# Altium PCB RS485.PcbDoc
Units mm, origin at the board's own origin, x right, y up, seen from the top; angles counter-clockwise.
Board outline 152.4 x 87.25 mm, 2 copper layers (Top Layer, Bottom Layer); 106 components, 76 nets, 344 pads, 58 vias.
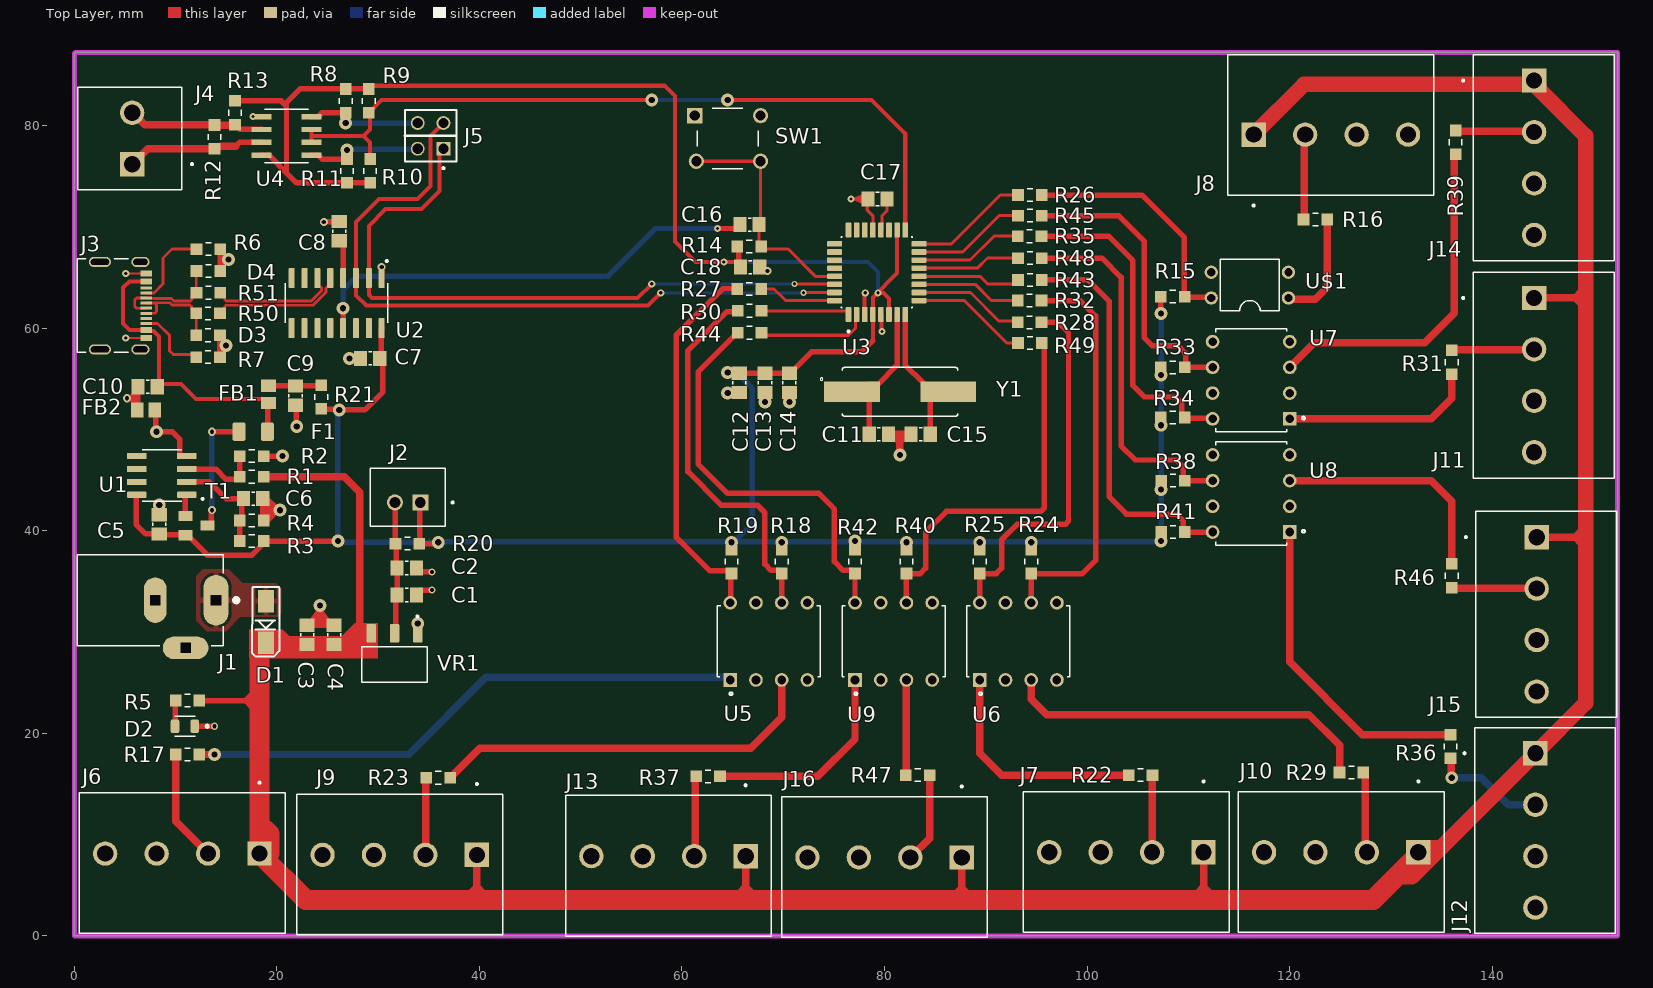
[diagram p0: Top Layer view]
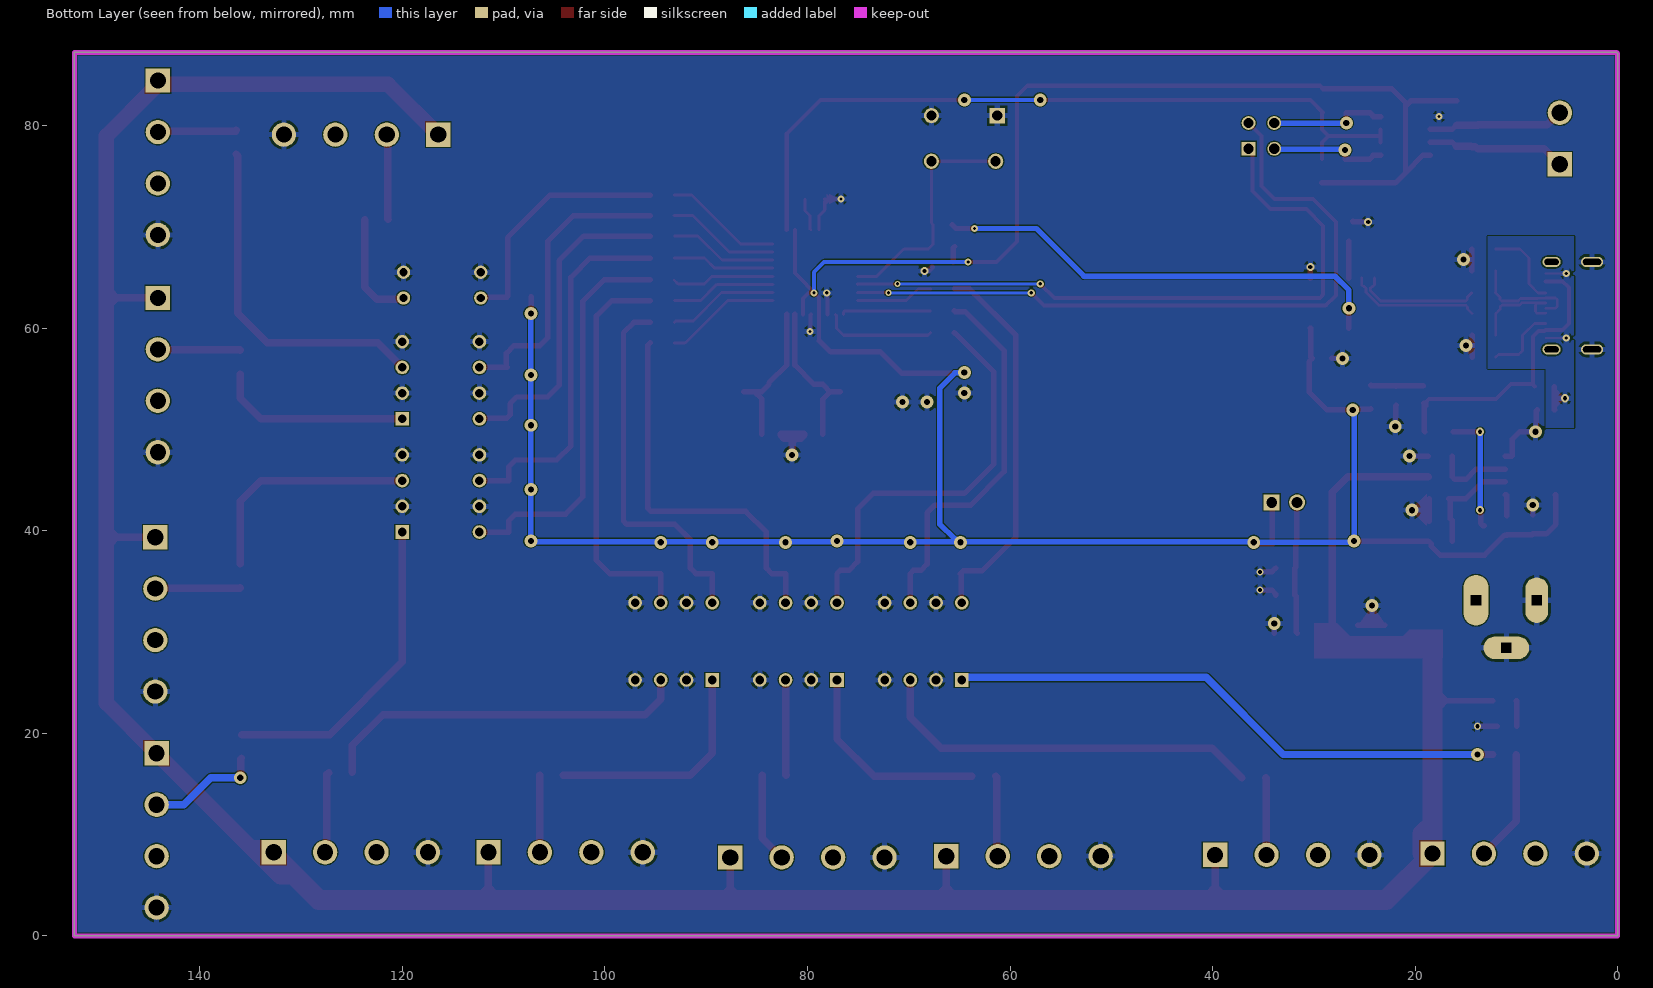
[diagram p1: Bottom Layer view, seen from below]
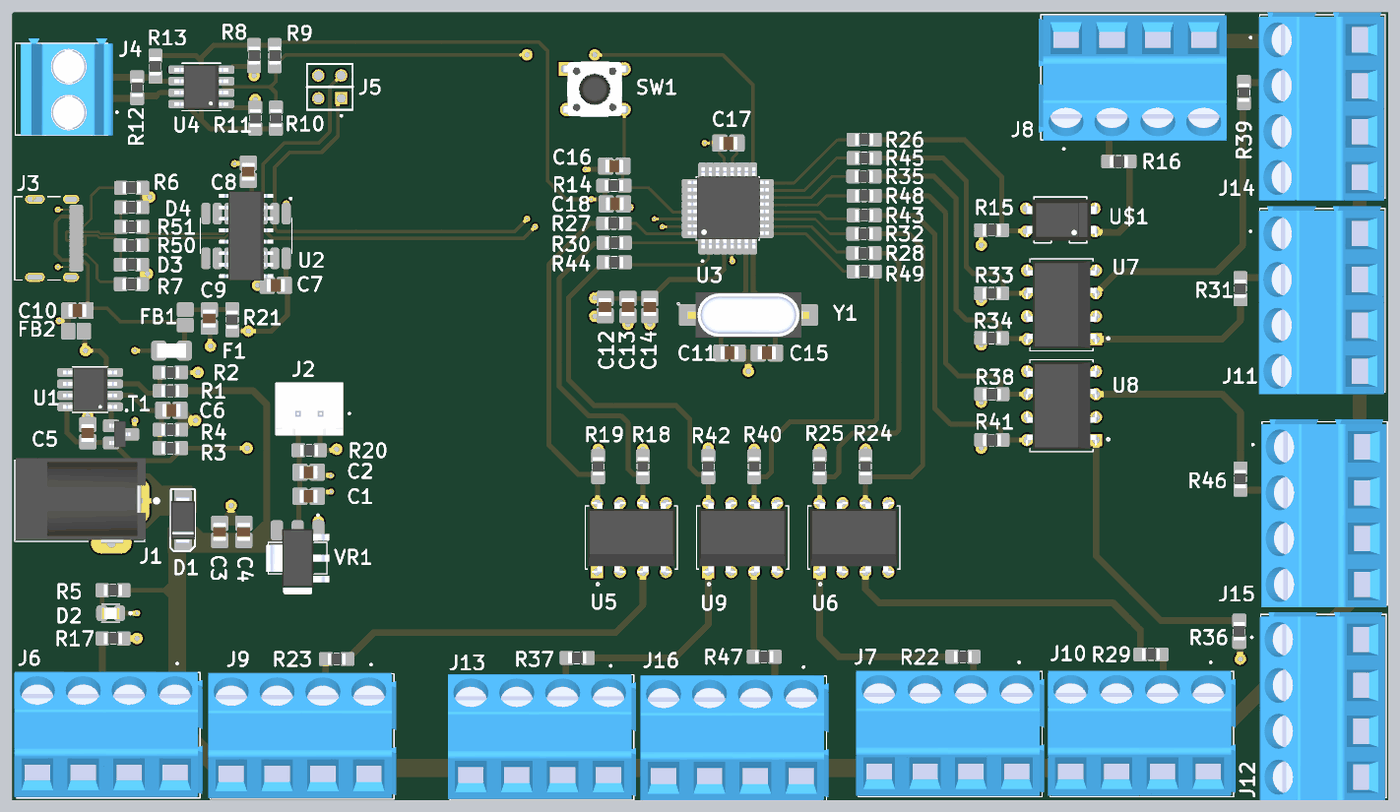
[diagram p2: 3D render of the assembled board from above, using the file's embedded part models]

## Layer stack, top to bottom
Top Solder: solder mask 0.0102, Solder Resist, Dk 3.5
Top Layer: signal copper 0.0356
Dielectric 1: dielectric 0.32, FR-4, Dk 4.8
Bottom Layer: signal copper 0.0356
Bottom Solder: solder mask 0.0102, Solder Resist, Dk 3.5

## Board outline
0,0 152.4,0 152.4,87.249 0.127,87.249 0,87.122

## Design rules (kind name [scope] priority, off if disabled: settings)
Clearance [All] p1: gap=0.1 ignorepadtopadclearanceinfootprint=FALSE
DiffPairsRouting [InDifferentialPairClass('DIFF_90E')] p1: maxlimit=0.127 minlimit=0.127 mostfreqgap=0.127 toplayer_minwidth=0.277 toplayer_maxwidth=0.277 toplayer_prefwidth=0.277 bottomlayer_minwidth=0.277 bottomlayer_maxwidth=0.277 bottomlayer_prefwidth=0.277 impedanceprofiledriven=TRUE impedanceprofileid={61A0B16F-B477-4809-B491-3CA5D92DA443} impedanceprofilevalue=90.000000 maxuncoupledlength=12.7
HoleSize [All] p1: absolutevalues=TRUE maxlimit=3.54 minlimit=0.025 maxpercent=80.000 minpercent=20.000
MinimumSolderMaskSliver [All] p1: minsoldermaskwidth=0.01
PasteMaskExpansion [All] p1: expansion=0.2
PlaneConnect [All] p1: planeconnectstyle=Relief reliefexpansion=0.508 reliefentries=4 reliefconductorwidth=0.454 reliefairgap=0.254
PolygonConnect [All] p1: connectstyle=Relief reliefconductorwidth=0.554 reliefentries=4 polygonreliefangle="90 Angle" airgapwidth=0.254
RoutingVias [All] p1: holewidth=0.411 width=0.7 viastyle="Through Hole" minholewidth=0.311 minwidth=0.5 maxholewidth=2 maxwidth=2.5
SilkToSilkClearance [All] p1: silktosilkclearance=0.01
SilkToSolderMaskClearance [IsPad] p1: minsilkscreentomaskgap=0.01 clearancetoexposedcopper=TRUE
SolderMaskExpansion [All] p1: expansion=0.202 istentingtop=FALSE
SupplyNets "Schematic Supply Nets_1" [InNet('GND')] p1: voltage=0.000
SupplyNets "Schematic Supply Nets_5" [InNet('+12')] p2: voltage=0.000
SupplyNets "Schematic Supply Nets_3" [InNet('VUSB')] p3: voltage=0.000
SupplyNets "Schematic Supply Nets_2" [InNet('+5')] p4: voltage=0.000
SupplyNets "Schematic Supply Nets" [InNet('+5DC')] p5: voltage=0.000
Width [All] p1: maxlimit=2 minlimit=0.2 preferedwidth=0.54
23 further rules are at their usual default settings.

## Classes and differential pairs
differential pair class DIFF_90E: USBD V_USBD
component class RS485_2: C11 C12 C13 C14 C15 C16 C17 C18 J4 J5 J6 J7 J8 J9 J10 J11 J12 J13 J14 J15 J16 R8 R9 R10 R11 R12 R13 R14 R15 R16 R17 R18 R19 R22 R23 R24 R25 R26 R27 R28 R29 R30 R31 R32 R33 R34 R35 R36 R37 R38 R39 R40 R41 R42 R43 R44 R45 R46 R47 R48 R49 SW1 U3 U4 U5 U6 U7 U8 U9 U$1 Y1
component class RS485_1: C1 C2 C3 C4 C5 C6 C7 C8 C9 C10 D1 D2 D3 D4 F1 FB1 FB2 J1 J2 J3 R1 R2 R3 R4 R5 R6 R7 R20 R21 R50 R51 T1 U1 U2 VR1
differential pair USBD: +USBD_P -USBD_N
differential pair V_USBD: +V_USBD_P -V_USBD_N

## Components (designator, comment, footprint, x,y, rotation, side; value= is the part's Value field where it differs from the comment)
C1 "CAP CER 10uF 5%" "CAP CER 100pF 5%" 32.827,33.655 r0 top
C2 "CAP CER 100nF 5%" "CAP CER 100pF 5%" 32.827,36.322 r0 top
C3 "CAP CER 10uF 5%" "CAP CER 100pF 5%" 22.987,29.718 r90 top
C4 "CAP CER 100nF 5%" "CAP CER 100pF 5%" 25.654,29.718 r90 top
C5 "CAP CER 100nF 5%" "CAP CER 100pF 5%" 8.382,40.64 r90 top
C6 "CAP CER 100nF 5%" "CAP CER 100pF 5%" 17.653,43.18 r0 top
C7 "CAP CER 100nF 5%" "CAP CER 100pF 5%" 29.21,57.023 r180 top
C8 "CAP CER 10nF 5%" "CAP CER 100pF 5%" 26.162,69.596 r90 top
C9 "CAP CER 100nF 5%" "CAP CER 100pF 5%" 21.844,53.34 r270 top
C10 "CAP CER 100nF 5%" "CAP CER 100pF 5%" 7.239,54.229 r180 top
C11 "CAP CER 22pF 5%" "CAP CER 100pF 5%" 79.441,49.53 r180 top
C12 "CAP CER 100nF 5%" "CAP CER 100pF 5%" 65.659,54.61 r270 top
C13 "CAP CER 100nF 5%" "CAP CER 100pF 5%" 68.199,54.61 r270 top
C14 "CAP CER 100nF 5%" "CAP CER 100pF 5%" 70.612,54.61 r270 top
C15 "CAP CER 22pF 5%" "CAP CER 100pF 5%" 83.566,49.53 r0 top
C16 "CAP CER 100nF 5%" "CAP CER 100pF 5%" 66.675,70.231 r0 top
C17 "CAP CER 100nF 5%" "CAP CER 100pF 5%" 79.309,72.771 r180 top
C18 "CAP CER 100nF 5%" "CAP CER 100pF 5%" 66.741,66.04 r0 top
D1 "Diode DO-214AC" "Diode DO-214AC" 18.923,31.006 r90 top
D2 "LED-0805" LED-0805 10.922,20.701 r180 top
D3 "0805" "TVS Diode,Uni-Directional, 4-Pin" 13.208,59.309 r180 top
D4 "0805" "TVS Diode,Uni-Directional, 4-Pin" 13.24,65.659 r180 top
F1 "1206" FUSE 17.661,49.784 r0 top
FB1 "Ferrite Bead" "Ferrite Bead" 19.177,53.467 r270 top
FB2 "Ferrite Bead" "Ferrite Bead" 7.083,51.943 r180 top
J1 "Dc Power Jack Connector" "Dc Power Jack Connector" 7.493,33.147 r180 top
J2 "2.54mm" JST_2PIN 32.913,43.324 r0 top
J3 "USB Type C" "USB Type C MOLEX" 3.683,62.23 r270 top
J4 "Connector 5.08 mm" "Connector 5.08 mm" 5.715,76.2 r90 top
J5 "4X2 PIN" "4PIN BURGE" 36.449,77.724 r90 top
J6 "4PIN 5.08MM" "TERMINSL SCREW" 18.288,8.128 r180 top
J7 "4PIN 5.08MM" "TERMINSL SCREW" 111.506,8.255 r180 top
J8 "4PIN 5.08MM" "TERMINSL SCREW" 116.459,79.121 r0 top
J9 "4PIN 5.08MM" "TERMINSL SCREW" 39.751,8.001 r180 top
J10 "4PIN 5.08MM" "TERMINSL SCREW" 132.715,8.255 r180 top
J11 "4PIN 5.08MM" "TERMINSL SCREW" 144.145,62.992 r270 top
J12 "4PIN 5.08MM" "TERMINSL SCREW" 144.272,18.034 r270 top
J13 "4PIN 5.08MM" "TERMINSL SCREW" 66.294,7.874 r180 top
J14 "4PIN 5.08MM" "TERMINSL SCREW" 144.145,84.455 r270 top
J15 "4PIN 5.08MM" "TERMINSL SCREW" 144.399,39.37 r270 top
J16 "4PIN 5.08MM" "TERMINSL SCREW" 87.63,7.747 r180 top
R1 "RES 0805 10K 5%" "RES 0805 10K 5%" 17.526,45.339 r0 top
R2 "RES 0805 10K 5%" "RES 0805 10K 5%" 17.526,47.371 r180 top
R3 "RES 0805 4.3K 5%" "RES 0805 10K 5%" 17.526,38.989 r180 top
R4 "RES 0805 10K 5%" "RES 0805 10K 5%" 17.526,41.021 r180 top
R5 "RES 0805 1K 5%" "RES 0805 10K 5%" 11.176,23.241 r180 top
R6 "RES 0805 5.1K 5%" "RES 0805 10K 5%" 13.24,67.818 r180 top
R7 "RES 0805 5.1K 5%" "RES 0805 10K 5%" 13.208,57.15 r0 top
R8 "RES 0805 10K 5%" "RES 0805 10K 5%" 26.797,82.455 r90 top
R9 "RES 0805 10K 5%" "RES 0805 10K 5%" 29.083,82.455 r90 top
R10 "RES 0805 10K 5%" "RES 0805 10K 5%" 29.21,75.533 r270 top
R11 "RES 0805 10K 5%" "RES 0805 10K 5%" 26.924,75.533 r270 top
R12 "RES 0805 120E 5%" "RES 0805 10K 5%" 13.843,78.899 r90 top
R13 "RES 0805 20K 5%" "RES 0805 10K 5%" 15.875,81.28 r270 top
R14 "RES 0805 10K 5%" "RES 0805 10K 5%" 66.643,68.072 r0 top
R15 "RES 0805 10K 5%" "RES 0805 10K 5%" 108.458,63.119 r180 top
R16 "RES 0805 1K 5%" "RES 0805 10K 5%" 122.555,70.739 r0 top
R17 "RES 0805 1K 5%" "RES 0805 10K 5%" 11.176,17.907 r0 top
R18 "RES 0805 10K 5%" "RES 0805 10K 5%" 69.85,36.957 r90 top
R19 "RES 0805 10K 5%" "RES 0805 10K 5%" 64.897,36.957 r90 top
R20 "RES 0805 0E 5%" "RES 0805 10K 5%" 32.893,38.735 r0 top
R21 "RES 0805 0E 5%" "RES 0805 10K 5%" 24.384,53.213 r90 top
R22 "RES 0805 1K 5%" "RES 0805 10K 5%" 105.283,15.875 r180 top
R23 "RES 0805 1K 5%" "RES 0805 10K 5%" 35.941,15.621 r0 top
R24 "RES 0805 10K 5%" "RES 0805 10K 5%" 94.488,36.957 r90 top
R25 "RES 0805 10K 5%" "RES 0805 10K 5%" 89.408,36.957 r90 top
R26 "RES 0805 0E 5%" "RES 0805 10K 5%" 94.361,73.152 r0 top
R27 "RES 0805 0E 5%" "RES 0805 10K 5%" 66.643,63.881 r180 top
R28 "RES 0805 0E 5%" "RES 0805 10K 5%" 94.329,60.579 r0 top
R29 "RES 0805 1K 5%" "RES 0805 10K 5%" 126.111,16.129 r180 top
R30 "RES 0805 0E 5%" "RES 0805 10K 5%" 66.675,61.722 r180 top
R31 "RES 0805 1K 5%" "RES 0805 10K 5%" 136.017,56.642 r270 top
R32 "RES 0805 0E 5%" "RES 0805 10K 5%" 94.329,62.738 r0 top
R33 "RES 0805 10K 5%" "RES 0805 10K 5%" 108.458,56.134 r180 top
R34 "RES 0805 10K 5%" "RES 0805 10K 5%" 108.458,51.181 r180 top
R35 "RES 0805 0E 5%" "RES 0805 10K 5%" 94.329,69.088 r0 top
R36 "RES 0805 1K 5%" "RES 0805 10K 5%" 135.89,18.701 r90 top
R37 "RES 0805 1K 5%" "RES 0805 10K 5%" 62.579,15.748 r0 top
R38 "RES 0805 10K 5%" "RES 0805 10K 5%" 108.49,44.958 r180 top
R39 "RES 0805 1K 5%" "RES 0805 10K 5%" 136.398,78.359 r270 top
R40 "RES 0805 10K 5%" "RES 0805 10K 5%" 82.169,36.957 r90 top
R41 "RES 0805 10K 5%" "RES 0805 10K 5%" 108.49,39.878 r180 top
R42 "RES 0805 10K 5%" "RES 0805 10K 5%" 77.089,36.957 r90 top
R43 "RES 0805 0E 5%" "RES 0805 10K 5%" 94.361,64.77 r0 top
R44 "RES 0805 0E 5%" "RES 0805 10K 5%" 66.675,59.563 r180 top
R45 "RES 0805 0E 5%" "RES 0805 10K 5%" 94.361,71.12 r0 top
R46 "RES 0805 1K 5%" "RES 0805 10K 5%" 136.017,35.56 r90 top
R47 "RES 0805 1K 5%" "RES 0805 10K 5%" 83.28,15.875 r180 top
R48 "RES 0805 0E 5%" "RES 0805 10K 5%" 94.361,66.929 r0 top
R49 "RES 0805 0E 5%" "RES 0805 10K 5%" 94.361,58.547 r0 top
R50 "RES 0805 22E 5%" "RES 0805 10K 5%" 13.208,61.468 r0 top
R51 "RES 0805 22E 5%" "RES 0805 10K 5%" 13.24,63.5 r0 top
SW1 "PUSH BUTTON" "Push Button" 64.516,78.74 r0 top
T1 "P-MOS SI2301" PMOS_SOT23 12.065,40.513 r270 top
U1 "SOIC-8" OPAMP 8.636,45.466 r180 top
U2 "HC340C" HC340C 25.908,62.484 r270 top
U3 "ATMEGA328P-AU" ATMEGA328P-AU 79.248,65.532 r90 top
U4 "MAX485CSA-RS-485/RS-422 Transceivers" "MAX485CSA-RS-485/RS-422 Transceivers" 20.955,78.994 r180 top
U5 "OPTOCOUPLER" OPTOCOUPLER 68.58,29.083 r90 top
U6 "OPTOCOUPLER" OPTOCOUPLER 93.218,29.083 r90 top
U7 "OPTOCOUPLER" OPTOCOUPLER 116.205,54.864 r180 top
U8 "OPTOCOUPLER" OPTOCOUPLER 116.205,43.688 r180 top
U9 "OPTOCOUPLER" OPTOCOUPLER 80.899,29.083 r90 top
U$1 "Optoc_4pin" Optoisolator 116.078,64.262 r90 top
VR1 "LM1117IMPX-5.0" LM1117IMPX-5.0 31.623,26.797 r270 top
Y1 "Crystal 16 Mhz SMD" "Crystal 16 Mhz SMD" 81.534,53.721 r0 top

## Footprints (in the part's own frame and the unit in brackets; to place one, negate y for a bottom-side part, rotate by r counter-clockwise, add the part's x,y. Pads: shape width x height; smd on the part's side, far side on the other; paste and mask are expansions set on the pad)
"4PIN BURGE" [mm] "Connector Header Through Hole 4 position 0.100 (2.54mm), 4X2 PIN"
  rect 1.37x1.37 hole 1.02: 01(0,0)
  round 1.37 hole 1.02: 02(0,2.54) 03(2.54,0) 04(2.54,2.54)
  silkscreen extent -2.02,-1.27 3.81,3.81
ATMEGA328P-AU [mm] "ATMEGA328P-AU MCU 8-bit 20 MHz - 32 KB - 2 KB - TQFN32"
  rrect25% 1.47x0.55 smd: 1(-4.17,2.8) 2(-4.17,2) 3(-4.17,1.2) 4(-4.17,0.4) 5(-4.17,-0.4) 6(-4.17,-1.2) 7(-4.17,-2) 8(-4.17,-2.8) 17(4.17,-2.8) 18(4.17,-2) 19(4.17,-1.2) 20(4.17,-0.4) 21(4.17,0.4) 22(4.17,1.2) 23(4.17,2) 24(4.17,2.8)
  rrect25% 0.55x1.47 smd: 9(-2.8,-4.17) 10(-2,-4.17) 11(-1.2,-4.17) 12(-0.4,-4.17) 13(0.4,-4.17) 14(1.2,-4.17) 15(2,-4.17) 16(2.8,-4.17) 25(2.8,4.17) 26(2,4.17) 27(1.2,4.17) 28(0.4,4.17) 29(-0.4,4.17) 30(-1.2,4.17) 31(-2,4.17) 32(-2.8,4.17)
  silkscreen extent -5.94,-3.5 3.5,3.5, body extent -4.43,-4.57 4.57,4.43, height 1.2
"CAP CER 100pF 5%" [mm] "CAP CER 100PF50V X7R 0805"
  rect 1.3x1.5 smd: 1(-0.95,0) 2(0.95,0)
  silkscreen extent -0.15,-0.65 0.15,0.65, body extent -1,-0.72 1,0.72, height 1.22
"Connector 5.08 mm" [mm] "MOLEX,Screw Type, Horizontal, 5.08 Pitch, 24~12 (AWG), Terminal Block Connector"
  rect 2.4x2.4 / inner round 2.4 / far side rect 2.4x2.4 hole 1.6: 1(0,0)
  round 2.4 hole 1.6: 2(5.08,0)
  silkscreen extent -2.54,-6 7.62,5.35, body extent -2.59,-5.46 8.17,4.79, height 14
"Crystal 16 Mhz SMD" [mm] "16 Mhz Crystal SMD –CSM-4ALX(28ALX) 12.5mmX4.85mmX4mm"
  rect 5.5x2 smd: 1(-4.75,0) 2(4.75,0)
  silkscreen extent -7.88,-2.41 5.71,2.41, body extent -6.75,-2.5 6.75,2.5, height 4.5
"Dc Power Jack Connector" [mm] "CUI_PJ-202AH"
  oval 2.5x5 hole 1 square: 1(-6.5,0)
  oval 2.25x4.5 hole 1 square: 2(-0.5,0)
  oval 4.5x2.25 hole 1 square: 3(-3.5,4.7)
  silkscreen extent -8.7,-4.5 7.2,4.5, body extent -7.29,-4.7 7.11,4.7, height 11
"Diode DO-214AC" [mm] "Diode Standard 100 V 1A Surface Mount DO-214AC (SMA)"
  rect 2.2x1.55 smd: 1(-2.05,0) 2(2.05,0)
  silkscreen extent -3.43,-1.33 3.43,1.4, body extent -2.55,-1.33 2.55,1.33, height 2.29
"Ferrite Bead" [mm] "Ferrite Bead 0805"
  rect 1.2x1.47 smd: 1(-0.86,0) 2(0.86,0)
FUSE [mm] "C1H25 .5 A 125 V AC 32 V DC Fuse Board Mount (Cartridge Style Excluded) Surface Mount 1206 (3216 Metric)"
  rrect30% 1.3x1.8 smd: 1(-1.405,0) 2(1.405,0)
  body extent -1.6,-0.79 1.6,0.79, height 0.85
HC340C [mm] "FTDI 16-SOIC"
  rrect25% 1.97x0.6 smd: 1(-2.475,4.445) 2(-2.475,3.175) 3(-2.475,1.905) 4(-2.475,0.635) 5(-2.475,-0.635) 6(-2.475,-1.905) 7(-2.475,-3.175) 8(-2.475,-4.445) 9(2.475,-4.445) 10(2.475,-3.175) 11(2.475,-1.905) 12(2.475,-0.635) 13(2.475,0.635) 14(2.475,1.905) 15(2.475,3.175) 16(2.475,4.445)
  silkscreen extent -4.24,-5.06 1.95,5.06, body extent -3,-4.95 3,4.95, height 1.75
JST_2PIN [mm] "B2B-XH-A(LF)(SN),Connector Header Through Hole 3 position 0.098 (2.50mm)Connector Header Through Hole 2 position 0.098 (2.50mm)"
  rect 1.575x1.575 / inner round 1.575 / far side rect 1.575x1.575 hole 1.05: 1(1.25,-0.525)
  round 1.575 hole 1.05: 2(-1.25,-0.525)
  silkscreen extent -3.7,-2.88 4.54,2.88, body extent -3.7,-2.88 3.7,2.88, height 7
LED-0805 [mm] "Red 640nm LED Indication - Discrete 1.85V 0805 (2012 Metric)"
  rrect50% 0.86x1.36 smd: A(0.975,0) C(-0.975,0)
  silkscreen extent -2.3,-0.99 1,0.99, body extent -1,-0.63 1,0.63, height 0.75
LM1117IMPX-5.0 [mm]
  rrect25% 1.84x0.93 smd: 1(-3.085,2.3) 2(-3.085,0) 3(-3.085,-2.3)
  rrect25% 1.84x3.19 on Top Overlay: 4(3.085,0)
  silkscreen extent -4.85,-3.25 1.75,3.25, body extent -3.5,-3.25 3.5,3.25, height 1.8
"MAX485CSA-RS-485/RS-422 Transceivers" [mil] "Low-Power, Slew-Rate-Limited RS-485/RS-422 Transceivers, SOIC-8"
  rect 78x21 smd: 1(-97,75) 2(-97,25) 3(-97,-25) 4(-97,-75) 5(97,-75) 6(97,-25) 7(97,25) 8(97,75)
  silkscreen extent -84,-104 84,104, body extent -118,-96 118,96, height 69
OPAMP [mm] "LMV342MA,Dual, 5.5-V, 1-MHz, high output current (75-mA) op amp,SOIC-8"
  rrect25% 1.97x0.6 smd: 1(-2.47,1.905) 2(-2.47,0.635) 3(-2.47,-0.635) 4(-2.47,-1.905) 5(2.47,-1.905) 6(2.47,-0.635) 7(2.47,0.635) 8(2.47,1.905)
  silkscreen extent -4.14,-2.52 1.95,2.52, body extent -3,-2.45 3,2.45, height 1.75
OPTOCOUPLER [mm] "TLP521-2,Optoisolateur Ã  sortie transistor 5300 Vrms 2 canaux 8 DIP"
  rect 1.35x1.35 / inner round 1.35 / far side rect 1.35x1.35 hole 0.85: 1(-3.81,3.81)
  round 1.35 hole 0.85: 2(-3.81,1.27) 3(-3.81,-1.27) 4(-3.81,-3.81) 5(3.81,-3.81) 6(3.81,-1.27) 7(3.81,1.27) 8(3.81,3.81)
  silkscreen extent -5.31,-5.09 3.5,5.09, body extent -3.94,-4.83 3.94,4.83, height 4.85
Optoisolator [mil] "TLP521-1,Optoisolator Transistor Output 5300Vrms 1 Channel 4-DIP"
  round 52 hole 32: 1(-50,-150) 2(50,-150) 3(50,150) 4(-50,150)
  silkscreen extent -100,-115 100,115, body extent -91,-160 91,150, height 197
PMOS_SOT23 [mm] "MOSFET P-CH 20V 2.2A SOT23-3"
  rect 1x1.4 smd: 1(-0.95,-1.1) 2(0.95,-1.1) 3(0,1.1)
  body extent -1.46,-1.31 1.46,1.06, height 1.25
"Push Button" [mm] "Switch Push Button OFF (ON) SPST Round Button 0.05A 24VDC Momentary Contact PC Pins Thru-Hole"
  rect 1.498x1.498 / inner round 1.498 / far side rect 1.498x1.498 hole 0.99: 1(-3.25,2.25)
  round 1.498 hole 0.99: 2(3.25,2.25) 3(-3.1,-2.25) 4(3.25,-2.25)
  silkscreen extent -3,-3 3,3, body extent -3.9,-3 3.9,3, height 17.01
"RES 0805 10K 5%" [mm] "RESISTOR, THICK FILM, 10K, 5%, 0805, FRESISTOR, THICK FILM, 10K, 5%, 0805, FULL REEL Product Range:PANASONIC - ERJ Series"
  rect 1.15x1.15 smd: 1(-1.175,0) 2(1.175,0)
  silkscreen extent -0.28,-0.63 0.28,0.63, body extent -1,-0.63 1,0.63, height 0.7
"TERMINSL SCREW" [mm] "TERMINSL SCREW, 4PIN, 5.08MM"
  rect 2.4x2.4 / inner round 2.4 / far side rect 2.4x2.4 hole 1.6: 1(0,0)
  round 2.4 hole 1.6: 2(5.08,0) 3(10.16,0) 4(15.24,0)
  silkscreen extent -2.54,-7.1 17.78,7.89, body extent -2.79,-6.1 18.03,7.79, height 15.82
"TVS Diode,Uni-Directional, 4-Pin" [mm] "TVS Diode,Uni-Directional,5V, 0805"
  rect 1.15x1.15 smd: 1(-1.175,0) 2(1.175,0)
  silkscreen extent -0.28,-0.63 0.28,0.63, body extent -1,-0.63 1,0.63, height 0.7
"USB Type C MOLEX" [mm] "USB Type C MOLEX_2171790001"
  rect 0.59x1.15 smd mask+0.064: A1B12(-3.2,3.425) A4B9(-2.4,3.425) B1A12(3.2,3.425) B4A9(2.4,3.425)
  rect 0.298x1.15 smd mask+0.064: A5(-1.25,3.425) A6(-0.25,3.425) A7(0.25,3.425) A8(1.25,3.425) B5(1.75,3.425) B6(0.75,3.425) B7(-0.75,3.425) B8(-1.75,3.425)
  oval 1x2.2 hole 0.6 slot 1.8 at 90 deg mask+0.064: SH1(-4.32,-1.15) SH2(4.32,-1.15)
  oval 1x1.8 hole 0.6 slot 1.4 at 90 deg mask+0.064: SH3(-4.32,2.85) SH4(4.32,2.85)
  silkscreen extent -4.62,-3.4 4.62,1.63

## Part data
C1 C2 C3 C4 C5 C6 C7 C8 C9 C10 C11 C12 C13 C14 C15 C16 C17 C18: library part "CAP CER 100pF 5%", "CAP CER 100PF50V X7R 0805", Package=None, Availability=Unavailable, MP=GCJ216R71H222KA01D, Price=None
D1: "Diode Standard 100 V 1A Surface Mount DO-214AC (SMA)", Package="DO-214 Vishay Semiconductor", Check_prices=https://www.snapeda.com/parts/S1B-E3/61T/Vishay/view-part/?ref=eda, MF="Vishay Semiconductor", MP=S1B-E3/61T, SnapEDA_Link=https://www.snapeda.com/parts/S1B-E3/61T/Vishay/view-part/?ref=snap
D2: "Red 640nm LED Indication - Discrete 1.85V 0805 (2012 Metric)", Package="0805 Kingbright", Check_prices=https://www.snapeda.com/parts/APT2012SRCPRV/Kingbright/view-part/?ref=eda, MF=Kingbright, MP=APT2012SRCPRV, SnapEDA_Link=https://www.snapeda.com/parts/APT2012SRCPRV/Kingbright/view-part/?ref=snap
D3 D4: library part "TVS Diode", "Nexperia PRTR5V0U2X,215, Dual-Element Uni-Directional TVS Diode, 0805, 5V", Package="TO-253-4 Nexperia USA Inc.", Availability="In Stock", Check_prices=https://www.snapeda.com/parts/PRTR5V0U2X/NXP+Semiconductors/view-part/?ref=eda, MF="NXP Semiconductors", MP=PRTR5V0U2X, Price=None, Purchase-URL=https://pricing.snapeda.com/search/part/PRTR5V0U2X/?ref=eda, SnapEDA_Link=https://www.snapeda.com/parts/PRTR5V0U2X/NXP+Semiconductors/view-part/?ref=snap
F1: library part FUSE, "C1H25 .5 A 125 V AC 32 V DC Fuse Board Mount (Cartridge Style Excluded) Surface Mount 1206 (3216 Metric)", Package="1206 Bel Fuse Inc.", Check_prices=https://www.snapeda.com/parts/C1H25/Bel+Circuit+Protection/view-part/?ref=eda, MF="Bel Fuse", MP=C1H25, SnapEDA_Link=https://www.snapeda.com/parts/C1H25/Bel+Circuit+Protection/view-part/?ref=snap
FB1 FB2: "Ferrite Bead 0805", Package=None, Availability=Unavailable, MP=MPZ2012S102AT000, Price=None
J1: "PJ-202AH, 2.0 x 6.5 mm, 5.0 A, Horizontal, Through Hole, Kinked Pins, Dc Power Jack Connector", Package=None, Check_prices=https://www.snapeda.com/parts/PJ-202AH/Same+Sky/view-part/?ref=eda, MF="Same Sky", MP=PJ-202AH, SnapEDA_Link=https://www.snapeda.com/parts/PJ-202AH/Same+Sky/view-part/?ref=snap
J2: library part JST_2PIN, "B2B-XH-A(LF)(SN),Connector Header Through Hole 3 position 0.098 (2.50mm)Connector Header Through Hole 2 position 0.098 (2.50mm)", Package=None, Check_prices=https://www.snapeda.com/parts/B2B-XH-A(LF)(SN)/JST/view-part/?ref=eda, MF="JST Sales", MP=B2B-XH-A(LF)(SN), SnapEDA_Link=https://www.snapeda.com/parts/B2B-XH-A(LF)(SN)/JST/view-part/?ref=snap
J3: "USB Type C - Connector, Top-mount SMT, 16pos", Package=None, Check_prices=https://www.snapeda.com/parts/217179-0001/Molex/view-part/?ref=eda, MF=Molex, MP=217179-0001, SnapEDA_Link=https://www.snapeda.com/parts/217179-0001/Molex/view-part/?ref=snap
J4: "MOLEX,Screw Type, Horizontal, 5.08 Pitch, 24~12 (AWG), Terminal Block Connector", Package=None, Check_prices=https://www.snapeda.com/parts/TB007-508-02BE/Same+Sky/view-part/?ref=eda, MF="Same Sky", MP=TB007-508-02BE, SnapEDA_Link=https://www.snapeda.com/parts/TB007-508-02BE/Same+Sky/view-part/?ref=snap
J5: library part "4PIN BURGE", "Connector Header Through Hole 4 position 0.100 (2.54mm), 4X2 PIN", Package=None, Check_prices=https://www.snapeda.com/parts/MTLW-102-05-G-D-180/Samtec/view-part/?ref=eda, MF=Samtec, MP=MTLW-102-05-G-D-180, SnapEDA_Link=https://www.snapeda.com/parts/MTLW-102-05-G-D-180/Samtec/view-part/?ref=snap
J6 J7 J8 J9 J10 J11 J12 J13 J14 J15 J16: library part "TERMINSL SCREW", "TERMINSL SCREW, 4PIN, 5.08MM", Package=None, Availability=Unavailable, MF="{'manufacturer': u'Phoenix Contact'}", MP=1995664, Price=None
R1 R2 R4 R8 R9 R10 R11 R14 R15 R18 R19 R24 R25 R33 R34 R38 R40 R41 R42: "RESISTOR, THICK FILM, 10K, 5%, 0805, FRESISTOR, THICK FILM, 10K, 5%, 0805, FULL REEL Product Range:PANASONIC - ERJ Series", Package="805-2 Panasonic", Availability="In Stock", Check_prices=https://www.snapeda.com/parts/ERJ-6GEYJ103V/Panasonic+Electronic+Components/view-part/?ref=eda, MF="Panasonic Electronic", MP=ERJ-6GEYJ103V, Price=None, Purchase-URL=https://pricing.snapeda.com/search/part/ERJ-6GEYJ103V/?ref=eda, SnapEDA_Link=https://www.snapeda.com/parts/ERJ-6GEYJ103V/Panasonic+Electronic+Components/view-part/?ref=snap
R3 R5 R6 R7 R12 R13 R16 R17 R20 R21 R22 R23 R26 R27 R28 R29 R30 R31 R32 R35 R36 R37 R39 R43 R44 R45 R46 R47 R48 R49 R50 R51: library part "RES 0805 10K 5%", "RESISTOR, THICK FILM, 10K, 5%, 0805, FRESISTOR, THICK FILM, 10K, 5%, 0805, FULL REEL Product Range:PANASONIC - ERJ Series", Package="805-2 Panasonic", Availability="In Stock", Check_prices=https://www.snapeda.com/parts/ERJ-6GEYJ103V/Panasonic+Electronic+Components/view-part/?ref=eda, MF="Panasonic Electronic", MP=ERJ-6GEYJ103V, Price=None, Purchase-URL=https://pricing.snapeda.com/search/part/ERJ-6GEYJ103V/?ref=eda, SnapEDA_Link=https://www.snapeda.com/parts/ERJ-6GEYJ103V/Panasonic+Electronic+Components/view-part/?ref=snap
SW1: "Switch Push Button OFF (ON) SPST Round Button 0.05A 24VDC Momentary Contact PC Pins Thru-Hole", Package=None, Check_prices=https://www.snapeda.com/parts/3-1825910-1/TE+Connectivity+ALCOSWITCH+Switches/view-part/?ref=eda, MF="TE Connectivity", MP=3-1825910-1, SnapEDA_Link=https://www.snapeda.com/parts/3-1825910-1/TE+Connectivity+ALCOSWITCH+Switches/view-part/?ref=snap
T1: "MOSFET P-CH 20V 2.2A SOT23-3", Package="SOT-23 MCC", Check_prices=https://www.snapeda.com/parts/SI2301/Micro+Commercial+Components/view-part/?ref=eda, MF="Micro Commercial Components (MCC)", MP=SI2301, SnapEDA_Link=https://www.snapeda.com/parts/SI2301/Micro+Commercial+Components/view-part/?ref=snap
U1: library part OPAMP, "LMV342MA,Dual, 5.5-V, 1-MHz, high output current (75-mA) op amp,SOIC-8", Package="SOIC-8 Texas Instruments", Check_prices=https://www.snapeda.com/parts/LMV342MAX/NOPB/Texas+Instruments/view-part/?ref=eda, MF="Texas Instruments", MP=LMV342MAX/NOPB, SnapEDA_Link=https://www.snapeda.com/parts/LMV342MAX/NOPB/Texas+Instruments/view-part/?ref=snap
U2: "FTDI 16-SOIC", Package="SOIC-16 ON Semiconductor", Check_prices=https://www.snapeda.com/parts/74HC595D/Toshiba/view-part/?ref=eda, MF=Toshiba, MP=74HC595D, SnapEDA_Link=https://www.snapeda.com/parts/74HC595D/Toshiba/view-part/?ref=snap
U3: "AVR AVRÂ® ATmega Microcontroller IC 8-Bit 20MHz 32KB (16K x 16) FLASH 32-TQFP (7x7)", Package="TQFP-32 Microchip", Check_prices=https://www.snapeda.com/parts/ATMEGA328P-AU/Microchip/view-part/?ref=eda, MF=Microchip, MP=ATMEGA328P-AU, SnapEDA_Link=https://www.snapeda.com/parts/ATMEGA328P-AU/Microchip/view-part/?ref=snap
U4: "Low-Power, Slew-Rate-Limited RS-485/RS-422 Transceivers", Package="SOIC-8 Maxim", Check_prices=https://www.snapeda.com/parts/MAX485CSA+/Analog+Devices/view-part/?ref=eda, MF="Analog Devices", MP=MAX485CSA+, SnapEDA_Link=https://www.snapeda.com/parts/MAX485CSA+/Analog+Devices/view-part/?ref=snap
U5 U6 U7 U8 U9: "TLP521-2,Optoisolateur Ã  sortie transistor 5300 Vrms 2 canaux 8 DIP", Package="DIP-8 Toshiba", Check_prices=https://www.snapeda.com/parts/TLP521-2/Toshiba/view-part/?ref=eda, MF=Toshiba, MP=TLP521-2, SnapEDA_Link=https://www.snapeda.com/parts/TLP521-2/Toshiba/view-part/?ref=snap
U$1: "TLP521-1,Optoisolator Transistor Output 5300Vrms 1 Channel 4-DIP", Package="DIP-4 Isocom Components", Check_prices=https://www.snapeda.com/parts/TLP521-1/Isocom/view-part/?ref=eda, MF=Isocom, MP=TLP521-1, SnapEDA_Link=https://www.snapeda.com/parts/TLP521-1/Isocom/view-part/?ref=snap
VR1: "800-mA 15-V linear voltage regulator", Package="SOT-223-4 Texas Instruments", Check_prices=https://www.snapeda.com/parts/LM1117IMPX-5.0/NOPB/Texas+Instruments/view-part/?ref=eda, MF="Texas Instruments", MP=LM1117IMPX-5.0/NOPB, SnapEDA_Link=https://www.snapeda.com/parts/LM1117IMPX-5.0/NOPB/Texas+Instruments/view-part/?ref=snap
Y1: "16 Mhz Crystal SMD –CSM-4ALX(28ALX) 12.5mmX4.85mmX4mm", Package="HC49SD Fox Electronics", Check_prices=https://www.snapeda.com/parts/FOXSDLF/128-20/Fox+Electronics/view-part/?ref=eda, MF="Fox Electronics", MP=FOXSDLF/128-20, SnapEDA_Link=https://www.snapeda.com/parts/FOXSDLF/128-20/Fox+Electronics/view-part/?ref=snap

## Via types
v1: diameter 1.27, hole 0.611, Top Layer to Bottom Layer, 36 vias
v2: diameter 0.7, hole 0.311, Top Layer to Bottom Layer, 11 vias
v3: diameter 0.8, hole 0.411, Top Layer to Bottom Layer, 6 vias
v4: diameter 0.7, hole 0.411, Top Layer to Bottom Layer, 3 vias
v5: diameter 0.6, hole 0.311, Top Layer to Bottom Layer, 1 vias
v6: diameter 0.611, hole 0.311, Top Layer to Bottom Layer, 1 vias

## Nets (pads, with @x,y where several pads share a name; then routed paths per layer and width w, separated by ;. In a path a pad name is that pad's centre, name@x,y a point inside that pad or via, vN(x,y) a via of type N, cw(c..) or ccw(c..) an arc to the next point about the centre after c; other vN are vias at no path point)
+5: C1.1 C2.1 J2.2 R20.1 VR1.2 | length 13.1
  Top Layer w0.54: VR1.2 31.75,30.009 31.75,33.528 C1.1 C2.1 31.798,36.401 31.798,38.656 R20.1 31.691,38.763 31.691,42.771 J2.2
+5DC: C5.1 C7.1 C12.1 C13.1 C14.1 C18.1 J2.1 R3.1 R8.2 R9.2 R10.2 R11.2 R13.1 R14.1 R15.2 R18.2 R19.2 R20.2 R21.1 R24.2 R25.2 R33.2 R34.2 R38.2 R40.2 R41.2 R42.2 T1.2 U1.8 U2.16 U3.4 U3.6 U3.18 U4.8 | length 315.8
  Top Layer w0.4: R9.2 29.4,83.947 58.293,83.947 59.309,82.931 59.309,68.58 61.341,66.548 v2(64.135,66.548) C18.1@65.63,66.548 ; 78.848,58.782 U3.4 78.848,63.057 81.248,65.457 U3.18 ; v2(79.375,63.5) 79.393,63.482 79.901,63.482 80.448,62.935 U3.6
  Top Layer w0.54: U1.8 6.126,43.561 6.096,43.531 6.096,40.64 7.046,39.69 C5.1 8.445,39.626 10.901,39.626 T1.2 11.165,39.563 13.136,37.592 17.526,37.592 18.396,38.462 18.396,38.684 R3.1 v1(26.035,38.989) ; R13.1 20.415,82.455 20.955,81.915 ; U4.8 19.209,77.089 20.955,75.343 ; R21.1 24.432,51.991 26.114,51.991 v1(26.162,51.943) 28.702,51.943 30.48,53.721 30.48,56.703 C7.1 30.323,57.186 30.323,59.979 U2.16 ; R9.2 R8.2 22.289,83.63 20.955,82.296 20.955,81.915 ; R10.2 R11.2 21.939,74.358 20.955,75.343 ; J2.1 34.115,42.751 34.115,38.783 R20.2 35.814,38.735 v1(35.941,38.862) ; R14.1 65.63,67.911 C18.1@65.63,66.548 ; C12.1 C13.1 C14.1 70.712,55.56 72.81,57.658 77.724,57.658 78.848,58.782 ; R15.2 107.299,63.103 107.299,61.484 v1(107.315,61.468) ; 20.955,75.343 20.955,81.915
  Bottom Layer w0.4: v2(64.135,66.548) 78.359,66.548 79.375,65.532 v2(79.375,63.5)
  Bottom Layer w0.54: v1@26.035,51.943 v1(26.035,38.989) 26.162,38.862 v1(35.941,38.862) 36.005,38.925 v1@64.897,38.925 ; v1(64.516,55.626) 64.553,55.589 65.442,55.589 66.929,54.102 66.929,40.64 65.506,39.217 65.449,39.217 65.095,38.862 v1(64.897,38.862) v1@64.897,38.925 ; v1(107.315,61.468) v1(107.315,55.372) v1(107.315,50.419) v1(107.315,44.069) v1(107.315,38.989) 107.251,38.925 v1@64.897,38.925
  other v1: 69.85,38.862 82.169,38.862 89.408,38.862 94.488,38.862 77.089,38.989
+12: C3.1 C4.1 D1.1 J6.1 J7.1 J8.1 J9.1 J10.1 J11.1 J12.1 J13.1 J14.1 J15.1 J16.1 R1.2 R5.1 VR1.3 | length 338.5
  Top Layer w0.54: R5.1 16.891,23.241 ; 17.653,22.479 16.891,23.241 ; 17.653,24.003 16.891,23.241 ; 38.227,3.556 38.354,3.556 39.751,4.953 ; 67.691,3.556 66.294,4.953 ; 86.868,4.064 87.63,4.826 88.392,4.064 ; 110.744,4.191 111.506,4.953 112.268,4.191 ; 148.844,38.608 148.082,39.37 ; 148.844,40.132 148.082,39.37 ; 148.844,62.23 148.082,62.992 ; 148.844,63.754 148.082,62.992 ; 149.225,39.37 148.082,39.37 ; 149.225,62.992 148.082,62.992 ; 39.751,4.953 39.751,4.318 40.513,3.556 40.513,4.191 39.751,4.953 ; 66.294,4.953 65.532,4.191 65.532,3.556 66.294,4.318 66.294,4.953
  Top Layer w0.74: R1.2 26.67,45.339 28.194,43.815 28.194,29.105 ; 39.751,4.953 J9.1 ; 66.294,4.953 J13.1 ; 87.63,4.826 J16.1 ; 111.506,3.556 111.506,4.953 J7.1 ; J11.1 148.082,62.992 ; J15.1 148.082,39.37
  Top Layer w1.54: J8.1 121.412,84.074 143.764,84.074 J14.1 144.575,84.025 144.575,83.644 149.225,78.994 149.225,62.992 149.225,39.37 149.225,22.987 J12.1 134.923,8.685 ; 130.556,5.842 132.08,5.842 134.923,8.685 ; J10.1 133.145,8.685 134.923,8.685
  Top Layer w2: D1.1@18.288,28.956 18.288,11.049 ; J6.1@19.241,8.128 19.241,10.096 18.288,11.049 ; 38.1,3.556 22.86,3.556 J6.1 18.288,11.049 ; 38.354,3.556 40.513,3.556 65.532,3.556 67.691,3.556 111.506,3.556 128.27,3.556 130.556,5.842 132.515,7.801 132.515,8.055 J10.1
DTR: C16.1 U2.13 | length 45.6
  Top Layer w0.54: U2.13 v1(26.543,61.976) ; v2(63.5,69.85) 65.345,69.85 C16.1
  Bottom Layer w0.54: v1(26.543,61.976) 26.543,62.547 26.543,63.119 26.543,63.754 27.94,65.151 52.705,65.151 57.404,69.85 v2(63.5,69.85)
EN: R9.1 R10.1 U3.17 U4.2 U4.3 | length 76
  Top Layer w0.4: U4.2 23.419,78.994 ; U4.3 23.419,78.994 ; R10.1 29.21,78.359 28.575,78.994 ; v1(57.023,82.55) 30.353,82.55 R9.1 29.21,81.153 29.21,79.629 28.575,78.994 ; v1(64.516,82.55) 78.74,82.55 82.048,79.242 U3.17 ; 23.419,78.994 28.575,78.994
  Bottom Layer w0.4: v1(57.023,82.55) v1(64.516,82.55)
GND: C1.2 C2.2 C3.2 C4.2 C5.2 C6.2 C7.2 C8.2 C9.2 C11.1 C12.2 C13.2 C14.2 C15.1 C17.2 C18.2 D2.C D3.1 D4.1 FB2.1 J1.2 J1.3 J3.SH1 J3.SH2 J6.4 J7.4 J8.4 J9.4 J10.4 J11.4 J12.4 J13.4 J14.4 J15.4 J16.4 R2.1 R4.1 R6.1 R7.2 SW1.1 SW1.2 U1.4 U2.1 U3.3 U3.5 U3.21 U4.5 U5.2 U5.4 U5.5 U5.7 U6.2 U6.4 U6.5 U6.7 U7.2 U7.4 U7.5 U7.7 U8.2 U8.4 U8.5 U8.7 U9.2 U9.4 U9.5 U9.7 U$1.2 U$1.3 VR1.1 | length 53.7
  Top Layer w0.3: v2(76.708,72.771) C17.2 ; C17.2@78.298,72.544 78.298,71.661 78.848,71.111 U3.21
  Top Layer w0.4: U3.3 v2@78.048,63.4 ; U3.5@79.664,61.341 79.702,61.302 79.702,59.744 v2(79.756,59.69)
  Top Layer w0.54: FB2.1 8.036,51.851 8.036,49.876 v1(8.128,49.784) 9.652,49.784 10.414,49.022 10.414,47.401 10.444,47.371 U1.4 ; C5.2 v1(8.382,42.545) ; D2.C v4(13.843,20.701) ; R7.2 v1@14.383,58.229 ; D3.1 v1@14.383,58.229 ; D4.1 14.415,66.739 ; R6.1 14.415,66.739 ; v1(14.986,58.293) 14.922,58.229 v1@14.383,58.229 ; v1(15.24,66.802) 15.176,66.739 14.415,66.739 ; C6.2 18.603,40.955 18.635,40.955 R4.1 19.006,41.326 19.006,41.358 19.545,41.897 20.18,41.897 v1(20.32,42.037) ; R2.1 v1(20.574,47.371) ; C9.2 21.907,52.326 21.907,50.355 v1(21.971,50.292) ; C3.2 24.32,30.668 ; v1(24.257,32.639) 24.257,32.512 24.32,32.448 24.32,30.668 ; v3@24.511,70.485 24.542,70.516 26.131,70.516 C8.2 ; C4.2 24.32,30.668 ; v1(27.178,57.023) C7.2 ; U2.1 v3(30.353,66.04) ; C1.2 33.777,33.752 34.157,34.132 35.275,34.132 v4(35.306,34.163) ; C2.2 34.127,35.972 35.275,35.972 v4(35.306,35.941) ; v1(33.909,30.861) 33.909,29.896 VR1.1 ; C18.2 68.022,65.709 68.403,65.709 v3(68.453,65.659) ; v2@78.048,63.4 78.105,63.457 v2(78.105,63.5)
  Top Layer w0.74: v1(81.534,47.498) 81.503,47.529 81.503,49.15 ; 81.503,49.15 82.336,49.15 82.616,49.43 C15.1 81.503,49.53 ; 81.503,49.15 81.503,49.53 ; 81.503,49.15 80.671,49.15 80.391,49.43 C11.1 81.503,49.53
  other v1: 68.199,52.705 70.612,52.705 64.516,53.594
  other v2: 17.653,80.899
  other v3: 24.638,70.485
NetC6_1: C6.1 R3.2 R4.2 U1.2 | length 10.6
  Top Layer w0.54: U1.2 13.335,44.831 14.986,43.18 C6.1 16.527,43.004 16.527,41.197 R4.2 R3.2
NetC8_1: C8.1 U2.4 | length 3.6
  Top Layer w0.54: U2.4 C8.1@26.543,68.58
NetC9_1: C9.1 FB1.1 R21.2 | length 5.3
  Top Layer w0.54: FB1.1 19.196,54.308 21.826,54.308 C9.1 21.893,54.339 24.335,54.339 R21.2
NetC10_2: C10.2 FB2.2 J3.A1B12 J3.B1A12 | length 7.4
  Top Layer w0.2: v2(5.08,59.055) 5.093,59.042 7.096,59.042 J3.B1A12 ; v2(5.08,65.405) 5.092,65.417 7.095,65.417 J3.A1B12
  Top Layer w0.54: v3(5.207,53.086) 6.256,53.086 ; FB2.2 6.256,51.976 6.256,53.086 ; C10.2 6.256,54.196 6.256,53.086
NetC17_1: C17.1 U3.20 | length 3.3
  Top Layer w0.3: U3.20 79.773,69.827 79.773,71.137 80.259,71.623 C17.1
NetD1_2: D1.2 J1.1
NetD2_A: D2.A R5.2 | length 2.6
  Top Layer w0.54: D2.A 9.974,20.728 9.974,23.214 R5.2
NetF1_1: F1.1 T1.3 | length 12.2
  Top Layer w0.54: T1.3 13.309,40.513 13.539,40.743 13.539,41.987 v3(13.589,42.037) ; v3(13.589,49.784) F1.1
  Bottom Layer w0.54: v3(13.589,42.037) v3(13.589,49.784)
NetJ3_A5: J3.A5 R6.2 | length 8.2
  Top Layer w0.277: J3.A5 7.114,63.486 7.86,63.486 8.763,64.389 8.763,66.929 9.652,67.818 R6.2
NetJ3_B5: J3.B5 R7.1 | length 7.2
  Top Layer w0.277: J3.B5 8.227,60.48 9.398,59.309 9.398,57.785 9.779,57.404 11.779,57.404 R7.1
NetJ4_1: J4.1 R12.1 U4.7 | length 13.7
  Top Layer w0.54: 15.947,77.978 16.328,78.359 U4.7
  Top Layer w0.74: J4.1 7.239,77.724 R12.1 14.048,77.929 14.432,77.929 14.481,77.978 15.947,77.978
NetJ4_2: J4.2 R12.2 R13.2 U4.6 | length 13.5
  Top Layer w0.54: R13.2 16.351,79.629 U4.6
  Top Layer w0.74: J4.2 5.772,81.28 6.978,80.074 R12.2 ; R12.2@13.843,80.042 R13.2@15.875,80.042
NetJ6_2: J6.2 R17.1 | length 11.1
  Top Layer w0.74: R17.1 10.001,11.335 J6.2
NetJ7_2: J7.2 R22.1 | length 7.6
  Top Layer w0.74: J7.2 106.442,8.271 106.442,15.859 R22.1
NetJ8_2: J8.2 R16.1 | length 8.4
  Top Layer w0.74: R16.1 121.46,70.818 121.46,79.042 J8.2
NetJ9_2: J9.2 R23.1 | length 7.7
  Top Layer w0.74: J9.2 34.719,8.049 34.719,15.573 R23.1
NetJ10_2: J10.2 R29.1 | length 8
  Top Layer w0.74: R29.1 127.46,15.954 127.46,8.43 J10.2
NetJ11_2: J11.2 R31.1 | length 8.2
  Top Layer w0.74: R31.1 136.065,57.864 144.097,57.864 J11.2
NetJ12_2: J12.2 R36.1 | length 11.3
  Top Layer w0.74: R36.1 135.953,17.462 135.953,15.684 v1(136.017,15.621)
  Bottom Layer w0.74: v1(136.017,15.621) 138.938,15.621 141.605,12.954 J12.2
NetJ13_2: J13.2 R37.1 | length 8
  Top Layer w0.74: J13.2 61.309,7.969 61.309,15.653 R37.1
NetJ14_2: J14.2 R39.1 | length 7.8
  Top Layer w0.74: R39.1 136.477,79.454 144.066,79.454 J14.2
NetJ15_2: J15.2 R46.1 | length 8.4
  Top Layer w0.74: R46.1 136.065,34.338 144.351,34.338 J15.2
NetJ16_2: J16.2 R47.1 | length 8.9
  Top Layer w0.74: J16.2 84.455,9.652 R47.1
NetR1_1: R1.1 R2.2 U1.3 | length 7.8
  Top Layer w0.54: U1.3 13.97,46.101 14.986,45.085 16.097,45.085 R1.1 R2.2
NetR15_1: R15.1 R26.2 U$1.4 | length 24.3
  Top Layer w0.54: R26.2 105.41,73.152 109.601,68.961 109.601,63.151 R15.1 109.696,63.055 112.204,63.055 U$1.4
NetR16_2: R16.2 U$1.1 | length 11.1
  Top Layer w0.74: U$1.1 119.999,62.881 121.636,62.881 121.652,62.865 122.555,62.865 123.73,64.04 R16.2
NetR17_2: R17.2 U5.1 | length 55.7
  Top Layer w0.73: R17.2 v1(13.843,17.907)
  Bottom Layer w0.73: v1(13.843,17.907) 33.02,17.907 40.64,25.527 64.516,25.527 U5.1
NetR18_1: R18.1 R30.2 U5.6 | length 37.8
  Top Layer w0.54: R30.2 65.415,61.637 64.431,61.637 60.579,57.785 60.579,45.847 63.881,42.545 67.437,42.545 68.199,41.783 68.199,36.703 68.815,36.087 69.545,36.087 R18.1 U5.6
NetR19_1: R19.1 R27.2 U5.8 | length 37.8
  Top Layer w0.54: U5.8 64.834,32.956 64.834,35.719 R19.1 64.611,36.068 62.738,36.068 59.436,39.37 59.436,59.309 64.008,63.881 R27.2
NetR22_2: R22.2 U6.1 | length 22.8
  Top Layer w0.73: U6.1 89.408,18.034 91.567,15.875 R22.2
NetR23_2: R23.2 U5.3 | length 38.9
  Top Layer w0.73: R23.2 40.037,18.542 66.802,18.542 69.85,21.59 U5.3
NetR24_1: R24.1 R32.2 U6.6 | length 39.9
  Top Layer w0.54: U6.6 R24.1 99.536,35.782 100.838,37.084 100.838,61.214 99.314,62.738 R32.2
NetR25_1: R25.1 R28.2 U6.8 | length 37.1
  Top Layer w0.54: U6.8 R25.1 91.027,35.782 91.567,36.322 91.567,39.116 93.091,40.64 97.855,40.64 98.171,40.956 98.171,59.563 97.155,60.579 R28.2
NetR29_2: R29.2 U6.3 | length 36.9
  Top Layer w0.73: U6.3 94.488,23.368 96.012,21.844 121.92,21.844 124.936,18.828 R29.2
NetR31_2: R31.2 U7.1 | length 19.2
  Top Layer w0.74: U7.1 133.985,51.054 136.017,53.086 R31.2
NetR33_1: R33.1 R45.2 U7.6 | length 29.6
  Top Layer w0.54: R45.2 103.124,71.12 105.664,68.58 105.664,59.055 106.426,58.293 108.966,58.293 109.728,57.531 109.728,56.229 R33.1 U7.6
NetR34_1: R34.1 R35.2 U7.8 | length 32.2
  Top Layer w0.54: R35.2 102.108,69.088 104.521,66.675 104.521,54.356 105.664,53.213 108.712,53.213 109.359,52.566 109.359,51.455 109.696,51.117 112.331,51.117 U7.8
NetR36_2: R36.2 U8.1 | length 31.7
  Top Layer w0.74: U8.1 120.015,27.051 127.19,19.876 R36.2
NetR37_2: R37.2 U9.1 | length 20.7
  Top Layer w0.73: R37.2 73.406,15.748 77.089,19.431 U9.1
NetR38_1: R38.1 R48.2 U8.6 | length 36.5
  Top Layer w0.54: R48.2 101.473,66.929 103.378,65.024 103.378,48.387 104.775,46.99 108.839,46.99 109.506,46.323 109.506,44.958 U8.6
NetR39_2: R39.2 U7.3 | length 34.2
  Top Layer w0.74: U7.3 122.428,58.547 133.35,58.547 136.271,61.468 136.271,77.057 R39.2
NetR40_1: R40.1 R49.2 U9.6 | length 37.6
  Top Layer w0.54: U9.6 R40.1 83.534,35.782 84.074,36.322 84.074,39.878 86.106,41.91 95.442,41.91 95.758,42.226 95.758,58.325 R49.2
NetR41_1: R41.1 R43.2 U8.8 | length 39.1
  Top Layer w0.54: R43.2 100.076,64.77 102.171,62.674 102.171,43.37 103.886,41.656 108.839,41.656 109.506,40.989 109.506,39.878 U8.8
NetR42_1: R42.1 R44.2 U9.8 | length 40.5
  Top Layer w0.54: R44.2 61.595,55.658 61.595,46.609 64.516,43.688 73.533,43.688 75.057,42.164 75.057,36.957 75.927,36.087 76.784,36.087 R42.1 U9.8
NetR46_2: R46.2 U8.3 | length 23
  Top Layer w0.74: U8.3 133.985,44.958 136.017,42.926 R46.2
NetR47_2: R47.2 U9.3 | length 9.4
  Top Layer w0.73: R47.2 82.137,15.907 82.137,25.241 U9.3
NetT1_1: T1.1 U1.1 | length 2.2
  Top Layer w0.54: T1.1 10.965,43.531 10.995,43.561 U1.1
R\S\T\\: C16.2 R14.2 SW1.3 SW1.4 U3.29 | length 23.4
  Top Layer w0.3: SW1.3 SW1.4 67.766,70.372 C16.2 67.625,68.265 68.072,67.818 70.485,67.818 73.171,65.132 U3.29
RX_P: J5.01 U2.2 U3.30 | length 66
  Top Layer w0.3: v5(71.12,64.389) 71.149,64.36 75.05,64.36 U3.30
  Top Layer w0.4: J5.01 36.068,77.343 36.068,73.533 34.29,71.755 30.734,71.755 29.083,70.104 U2.2 29.083,63.308 29.399,62.992 55.626,62.992 v2(57.023,64.389)
  Bottom Layer w0.3: v2@57.277,64.389 v5(71.12,64.389)
RXD1: J5.02 R11.1 U4.1 | length 11.6
  Top Layer w0.54: U4.1 24.136,77.089 24.139,77.086 24.139,77.028 24.459,76.708 R11.1 v1(26.924,77.597)
  Bottom Layer w0.54: v1(26.924,77.597) 26.987,77.66 33.846,77.66 J5.02
SNR1: R27.1 U3.32 | length 7.7
  Top Layer w0.3: R27.1 69.088,63.881 70.237,62.732 U3.32
SNR2: R30.1 U3.1 | length 8.9
  Top Layer w0.3: R30.1 76.323,61.722 76.448,61.597 U3.1
SNR3: R44.1 U3.2 | length 11.1
  Top Layer w0.3: R44.1 68.104,59.309 76.454,59.309 77.123,59.978 77.123,61.237 U3.2
SNR4: R49.1 U3.9 | length 11.5
  Top Layer w0.3: U3.9 87.89,62.732 92.075,58.547 R49.1
SNR5: R28.1 U3.10 | length 11
  Top Layer w0.3: U3.10 88.487,63.532 91.313,60.706 93.027,60.706 R28.1
SNR6: R32.1 U3.11 | length 10.4
  Top Layer w0.3: U3.11 88.957,64.332 90.551,62.738 R32.1
SNR7: R43.1 U3.12 | length 10.2
  Top Layer w0.3: U3.12 89.427,65.132 90.17,64.389 92.805,64.389 R43.1
SNR8: R48.1 U3.13 | length 10.2
  Top Layer w0.3: U3.13 89.173,65.932 90.17,66.929 R48.1
SNR9: R35.1 U3.14 | length 10.7
  Top Layer w0.3: U3.14 88.449,66.732 90.805,69.088 R35.1
SNR10: R45.1 U3.15 | length 11.3
  Top Layer w0.3: U3.15 87.725,67.532 91.313,71.12 R45.1
SNR11: R26.1 U3.16 | length 11.8
  Top Layer w0.3: U3.16 86.62,68.332 91.44,73.152 R26.1
TX_N: J5.03 U2.3 U3.31 | length 70.7
  Top Layer w0.3: v6(72.009,63.5) 72.025,63.516 75.062,63.516 U3.31
  Top Layer w0.4: J5.03 35.179,78.994 35.179,74.041 33.909,72.771 30.099,72.771 27.813,70.485 U2.3 27.813,63.246 28.829,62.23 56.642,62.23 v2@57.785,63.373
  Bottom Layer w0.3: v2@58.039,63.5 v6(72.009,63.5)
  other v2: 57.912,63.5
TXD1: J5.04 R8.1 U4.4 | length 11.7
  Top Layer w0.54: U4.4 24.136,80.899 24.139,80.902 24.139,80.96 24.459,81.28 R8.1 v1(26.797,80.264)
  Bottom Layer w0.54: v1(26.797,80.264) J5.04
USBD_N: D4.2 J3.A7 J3.B7 R51.1 | length 10.8
  Top Layer w0.277: J3.A7 6.131,61.98 5.969,62.142 5.969,62.818 6.131,62.98 J3.B7 7.118,62.97 7.821,62.97 7.859,62.932 9.589,62.932 9.829,62.693 11.466,62.693 11.629,62.855 11.629,63.064 R51.1 ; R51.1@12.033,63.5 12.033,65.627 D4.2
USBD_P: D3.2 J3.A6 J3.B6 R50.1 | length 9.7
  Top Layer w0.277: J3.B6 7.118,61.49 7.966,61.49 8.128,61.653 8.128,62.307 7.966,62.47 ; J3.A6@7.118,62.47 J3.A6 7.118,62.49 7.821,62.49 7.859,62.528 9.422,62.528 9.661,62.289 11.434,62.289 11.597,62.126 11.597,61.904 R50.1 D3.2
V_USBD_N: R51.2 U2.6 | length 12.4
  Top Layer w0.277: R51.2 14.851,63.064 14.851,62.842 15.014,62.679 23.395,62.679 24.436,63.721 24.436,63.95 24.274,64.113 24.164,64.113 24.003,64.274 U2.6
V_USBD_P: R50.2 U2.5 | length 13.1
  Top Layer w0.277: R50.2 14.819,61.904 14.819,62.113 14.982,62.275 23.562,62.275 24.84,63.553 24.84,63.95 25.002,64.113 25.112,64.113 25.273,64.274 U2.5
VUSB: C10.1 F1.2 FB1.2 J3.A4B9 J3.B4A9 | length 29.8
  Top Layer w0.4: J3.A4B9 5.448,64.63 4.826,64.008 4.826,60.452 5.448,59.83 J3.B4A9 7.203,59.735 7.839,59.735 8.382,59.192 C10.1@8.382,54.422 ; C10.1 8.443,54.483 10.541,54.483 12.017,53.007 18.642,53.007 18.894,52.755 FB1.2@18.894,52.324
  Top Layer w0.54: F1.2 19.122,49.839 19.122,52.324 19.122,52.552 FB1.2
XTAL1: C11.2 U3.7 Y1.1 | length 15.1
  Top Layer w0.54: Y1.1 Y1.1@77.761,53.721 ; C11.2 78.491,52.991 Y1.1@77.761,53.721 ; U3.7 81.248,56.356 79.343,54.451 78.491,54.451 Y1.1@77.761,53.721
XTAL2: C15.2 U3.8 Y1.2 | length 14.9
  Top Layer w0.54: U3.8 82.048,56.382 83.804,54.626 83.804,54.451 84.534,53.721 Y1.2@85.246,53.721 ; C15.2 84.516,52.991 Y1.2@85.246,53.721 ; Y1.2 Y1.2@85.246,53.721
pads on no net: J3.A8 J3.B8 J3.SH3 J3.SH4 J6.3 J7.3 J8.3 J9.3 J10.3 J11.3 J12.3 J13.3 J14.3 J15.3 J16.3 U1.5 U1.6 U1.7 U2.7 U2.8 U2.9 U2.10 U2.11 U2.12 U2.14 U2.15 U3.19 U3.22 U3.23 U3.24 U3.25 U3.26 U3.27 U3.28 VR1.4

## Polygon pours and split planes (outlines as drawn)
GND on Bottom Layer "GND_L02_P003" (solid, pour order 3): 0,0.127 152.273,0.127 152.273,87.122 152.146,87.249 0,87.249 0,0
NetC10_2 on Bottom Layer "NETC10_2_L02_P002" (solid, pour order 2): 4.318,50.165 7.112,50.165 7.112,56.007 12.827,56.007 12.827,69.088 4.318,69.088 4.318,61.849
NetD1_2 on Top Layer "NETD1_2_L01_P000" (solid, pour order 0): 15.24,36.195 16.637,34.798 19.939,34.798 20.447,34.29 20.447,31.877 20.066,31.496 16.383,31.496 14.986,30.099 13.081,30.099 12.065,31.115 12.065,35.56 12.7,36.195

## Keep-outs
Keep-Out Layer:
  the board outline again, w0.5

## Other copper
Top Layer:
  region net +12: 17.272,30.226 20.574,30.226 21.209,29.591 26.416,29.591 27.686,30.861 29.972,30.861 29.972,27.432 17.272,27.432
  region net NetC10_2: 5.207,53.147 5.207,53.025 6.256,51.976 6.272,51.992 6.272,54.213
  region net GND: 24.229,32.611 22.86,30.668 25.606,30.668
  region net GND: 18.851,43.682 18.851,40.534 18.898,40.488 20.472,42.062
  region net GND: 77.851,72.263 77.851,73.279 77.343,73.025 76.708,72.771
  region net GND: 78.105,73.279 77.597,72.771 78.105,72.263
  region net GND: 80.671,49.15 82.314,49.15 81.503,48.339 81.482,48.339
  region net GND: 14.383,59.309 15.367,58.325 15.367,58.134 14.383,57.15
  region net GND: 14.415,67.627 15.303,66.739 15.177,66.612 15.177,66.739 15.303,66.739 14.764,66.199 14.415,66.199

## Silkscreen, mask and mechanical layers (free items; w line width, h text height)
Top Overlay:
  lines w0.25: 32.639,78.994 37.719,78.994